# Altium PCB KHAZEN.PcbDoc
Units mm, origin at the board's own origin, x right, y up, seen from the top; angles counter-clockwise.
Board outline 460.5 x 241.17 mm, 2 copper layers (Top Layer, Bottom Layer); 2 components, 0 nets, 26 pads, 0 vias.
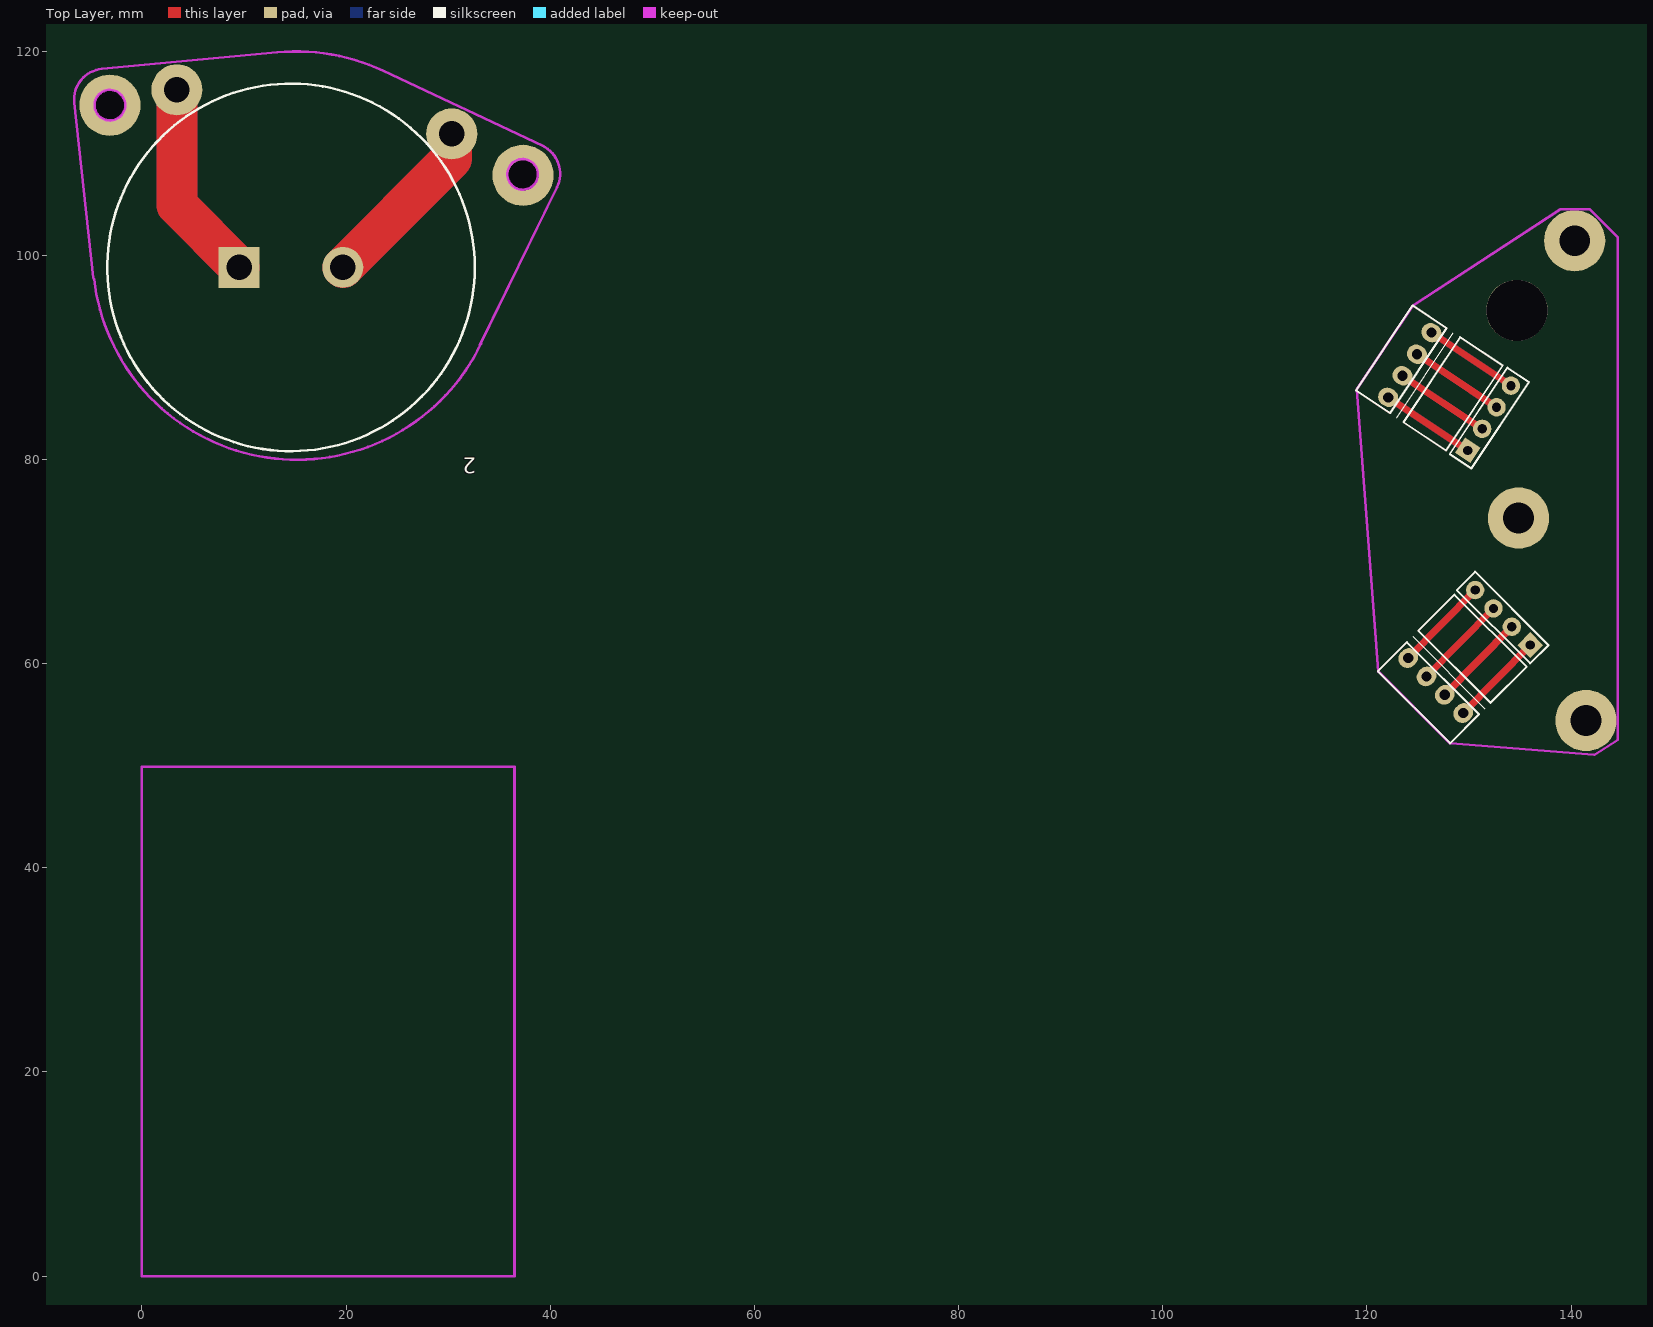
[diagram p0: Top Layer view]
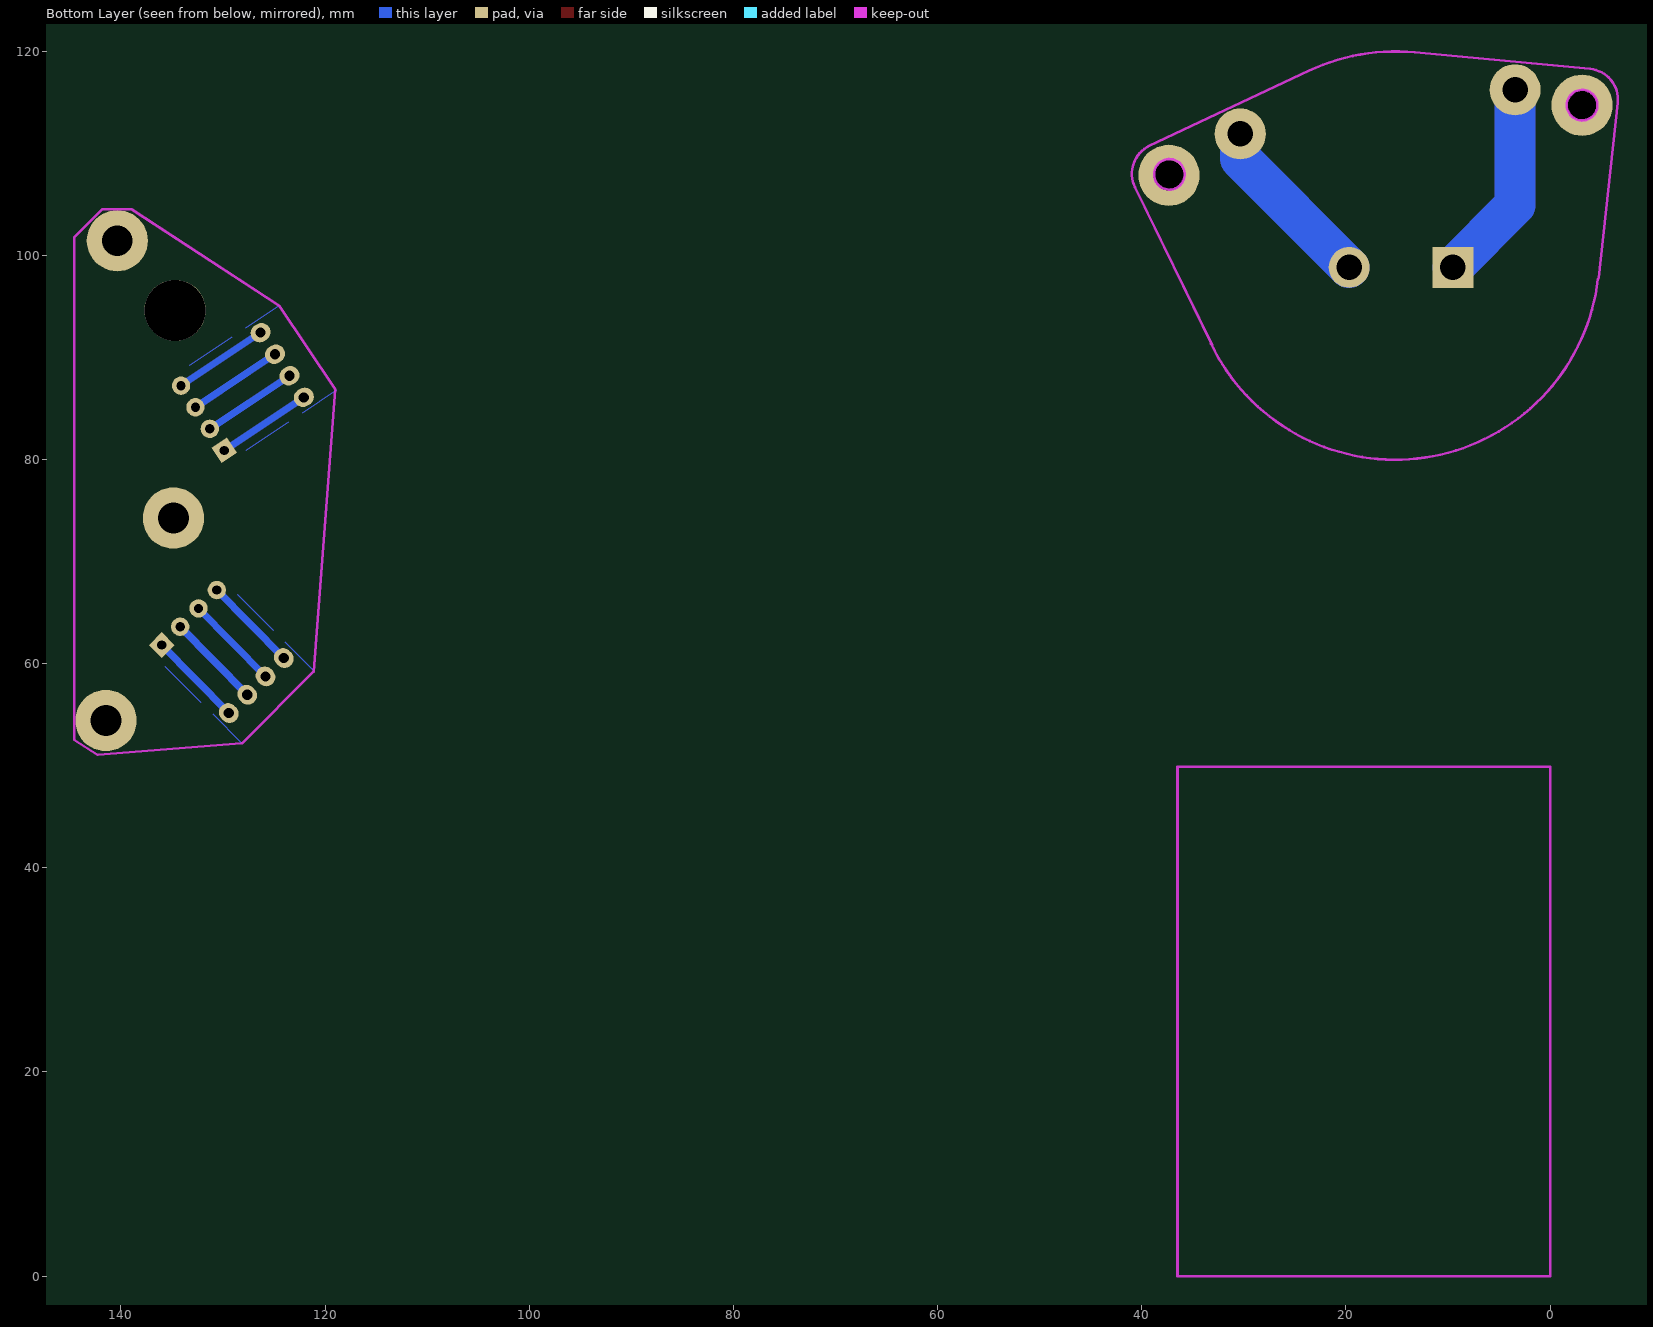
[diagram p1: Bottom Layer view, seen from below]

## Layer stack, top to bottom
Top Layer: signal copper 0.0356
Dielectric: dielectric 0.32, FR-4, Dk 4.8
Bottom Layer: signal copper 0.0356

## Board outline
-81.28,129.921 298.577,129.921 365.633,62.865 365.633,-23.241 279.654,-109.22 277.622,-111.252 -94.869,-111.252

## Design rules (kind name [scope] priority, off if disabled: settings)
Clearance [All] p1: gap=0.254
FabricationTestpoint [(IsPad And (OnTopLayer Or OnBottomLayer))] p1: side=3 testpointundercomponent=TRUE minsize=1.016 maxsize=2.54 preferedsize=1.524 minholesize=0 maxholesize=1.016 preferedholesize=0.813 testpointgrid=0.025 allowsidetop=TRUE allowsidebottom=TRUE usegrid=TRUE gridtolerance=0
PolygonConnect [All] p1: connectstyle=Relief reliefconductorwidth=0.254 reliefentries=4 polygonreliefangle="90 Angle" airgapwidth=0.254
RoutingVias [All] p1: holewidth=0.711 width=1.27 viastyle="Through Hole" minholewidth=0.711 minwidth=1.27 maxholewidth=0.711 maxwidth=1.27
SolderMaskExpansion [All] p1: expansion=0.102
Width [All] p1: maxlimit=0.254 minlimit=0.254 preferedwidth=0.254
27 further rules are at their usual default settings.

## Components (designator, comment, footprint, x,y, rotation, side; value= is the part's Value field where it differs from the comment)
2 "" EL_B 14.605,98.806 r180 top
? "" enc 134.747,73.914 r0 top

## Footprints (in the part's own frame and the unit in brackets; to place one, negate y for a bottom-side part, rotate by r counter-clockwise, add the part's x,y. Pads: shape width x height; smd on the part's side, far side on the other; paste and mask are expansions set on the pad)
EL_B [mm]
  rect 4x4 hole 2.5: 1(5.08,0)
  round 4 hole 2.5: 2(-5.08,0)
  silkscreen extent -18,-18 18,18, body extent -17.98,-18.02 17.98,17.9, height 15
enc [mm]
  oval 1.8x2 hole 1 rot 56.31: 1(-12.665,12.165) 2(-11.257,14.278) 3(-9.848,16.391) 4(-8.439,18.505)
  oval 1.8x2 hole 1 rot 135: 1(-5.323,-18.761) 2(-7.119,-16.965) 3(-8.915,-15.169) 4(-10.711,-13.373)
  rect 1.8x1.8 hole 0.9 rot 56.31: 1(-4.87,6.97)
  rect 1.8x1.8 hole 0.9 rot 135: 1(1.24,-12.1)
  round 1.8 hole 0.9: 2(-3.461,9.083) 2(-0.556,-10.304) 3(-2.352,-8.508) 3(-2.052,11.197) 4(-4.148,-6.712) 4(-0.643,13.31)
  round 6 hole 3: 7(0.102,0.344) 8(5.595,27.512) 9(6.714,-19.491)
  round 6 hole 6: 10(-0.061,20.684)
  Top Layer lines w0.1: -15.822,12.839 -12.493,10.62 ; -13.674,-14.653 -10.846,-11.824 ; -11.162,9.732 -7.002,6.959 ; -10.275,21.159 -6.947,18.94 ; -9.714,-10.693 -6.179,-7.158 ; -6.603,-21.724 -3.774,-18.896 ; -5.615,18.053 -1.455,15.279 ; -2.643,-17.764 0.892,-14.229
  Top Layer lines w0.7: -12.665,12.165 -4.87,6.97 ; -11.257,14.278 -3.461,9.083 ; -10.711,-13.373 -4.148,-6.712 ; -9.848,16.391 -2.052,11.197 ; -8.915,-15.169 -2.352,-8.508 ; -8.439,18.505 -0.643,13.31 ; -7.119,-16.965 -0.556,-10.304 ; -5.323,-18.761 1.24,-12.1
  Bottom Layer lines w0.1: -15.822,12.839 -12.493,10.62 ; -13.674,-14.653 -10.846,-11.824 ; -11.162,9.732 -7.002,6.959 ; -10.275,21.159 -6.947,18.94 ; -9.714,-10.693 -6.179,-7.158 ; -6.603,-21.724 -3.774,-18.896 ; -5.615,18.053 -1.455,15.279 ; -2.643,-17.764 0.892,-14.229
  Bottom Layer lines w0.7: -12.665,12.165 -4.87,6.97 ; -11.257,14.278 -3.461,9.083 ; -10.711,-13.373 -4.148,-6.712 ; -9.848,16.391 -2.052,11.197 ; -8.915,-15.169 -2.352,-8.508 ; -8.439,18.505 -0.643,13.31 ; -7.119,-16.965 -0.556,-10.304 ; -5.323,-18.761 1.24,-12.1
  Keep-Out Layer lines w0.254: 4.21,30.58 -10.258,21.148 -15.748,12.967 -13.629,-14.693 -6.603,-21.724 7.507,-22.863 9.81,-21.391 9.81,27.85 7.06,30.6 4.21,30.6
  silkscreen extent -15.82,-21.72 3.04,21.16

## Free pads (board coordinates)
  round 6 hole 3: 0(-3.134,114.699) 0(37.338,107.823)
  round 5 hole 2.5: 1(30.353,111.887) 2(3.429,116.205)

## Nets (pads, with @x,y where several pads share a name; then routed paths per layer and width w, separated by ;. In a path a pad name is that pad's centre, name@x,y a point inside that pad or via, vN(x,y) a via of type N, cw(c..) or ccw(c..) an arc to the next point about the centre after c; other vN are vias at no path point)
pads on no net: 2.1 2.2 ?.1 ?.2 ?.3 ?.4 ?.7 ?.8 ?.9 ?.10
copper on no net: | length 148.7
  Top Layer w2: 3.429,115.57 3.429,104.902 9.525,98.806 ; 19.685,98.806 30.099,109.22 30.099,112.141
  Top Layer w4: 3.429,116.205 3.429,104.902 9.525,98.806 ; 19.685,98.806 30.353,109.474 30.353,111.887
  Bottom Layer w2: 3.429,115.57 3.429,104.902 9.525,98.806 ; 19.685,98.806 30.099,109.22 30.099,112.141
  Bottom Layer w4: 3.429,116.205 3.429,104.902 9.525,98.806 ; 19.685,98.806 30.353,109.474 30.353,111.887

## Keep-outs
Keep-Out Layer:
  circle w0.254: c37.294,107.927 r1.5
  circle w0.254: c-3.134,114.699 r1.5
  lines w0.254: -4.755,97.804 -6.617,114.944 cw(c-3.634,115.268) -3.916,118.254 13.248,119.875 cw(c15.128,99.963) 23.65,118.057 39.247,110.71 cw(c37.969,107.996) 40.664,106.68 33.099,91.188 ; -4.687,97.674 ccw(c15.181,99.974) 33.214,91.326 ; 0,0 0,49.9 36.5,49.9 36.5,0 0,0